# Altium PCB ups_lead_acid_electgpl_v1.0(1).PcbDoc (part 1 of 2)
Units mm, origin at the board's own origin, x right, y up, seen from the top; angles counter-clockwise.
Board outline 152.4 x 101.6 mm, 18 copper layers (F.Cu, F.Mask, B.Cu, B.Mask, F.SilkS, B.SilkS, F.Adhes, B.Adhes, F.Paste, B.Paste, Dwgs.User, Cmts.User, Eco1.User, Eco2.User, Edge.Cuts, Margin, B.CrtYd, F.CrtYd); 78 components, 42 nets, 240 pads, 288 vias.
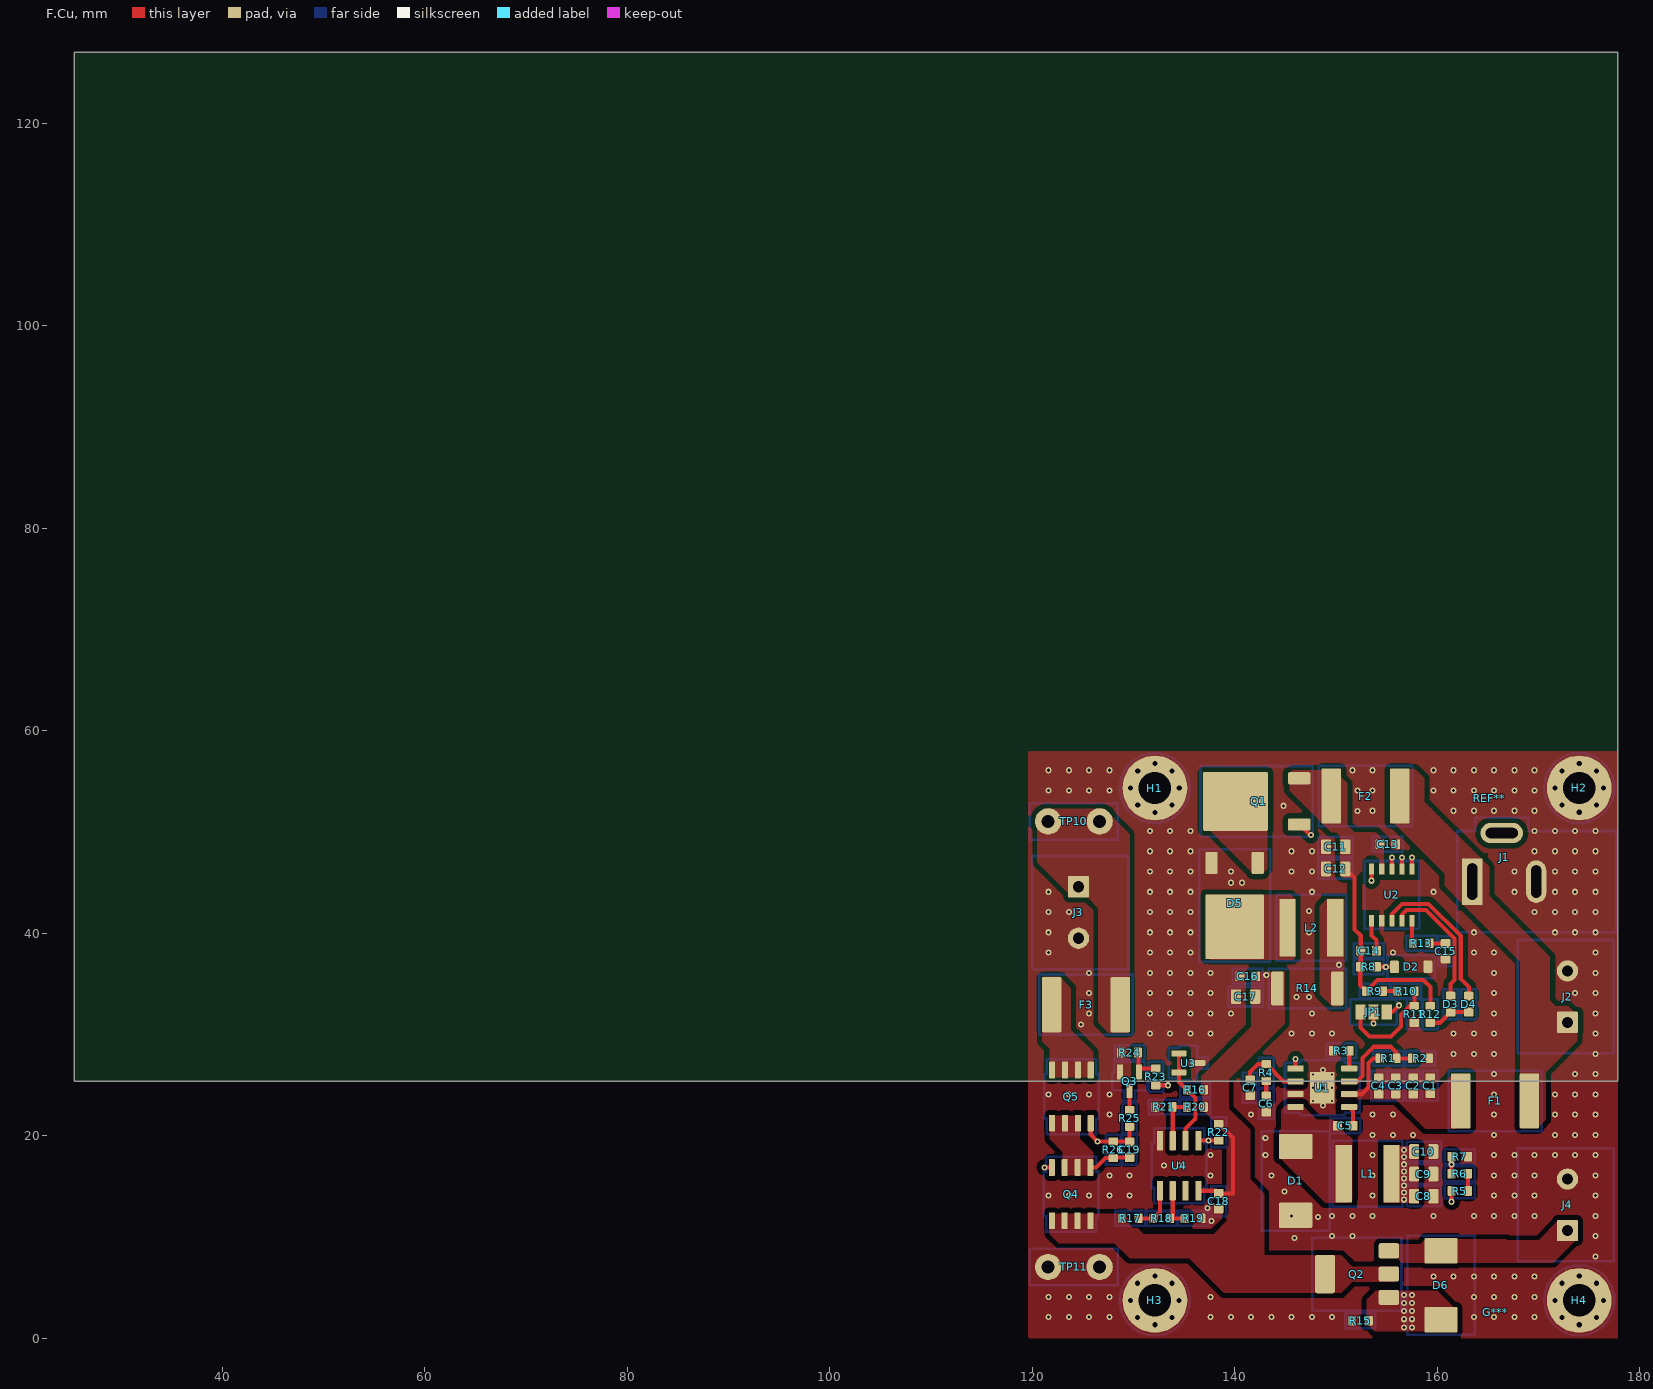
[diagram p0: F.Cu view]
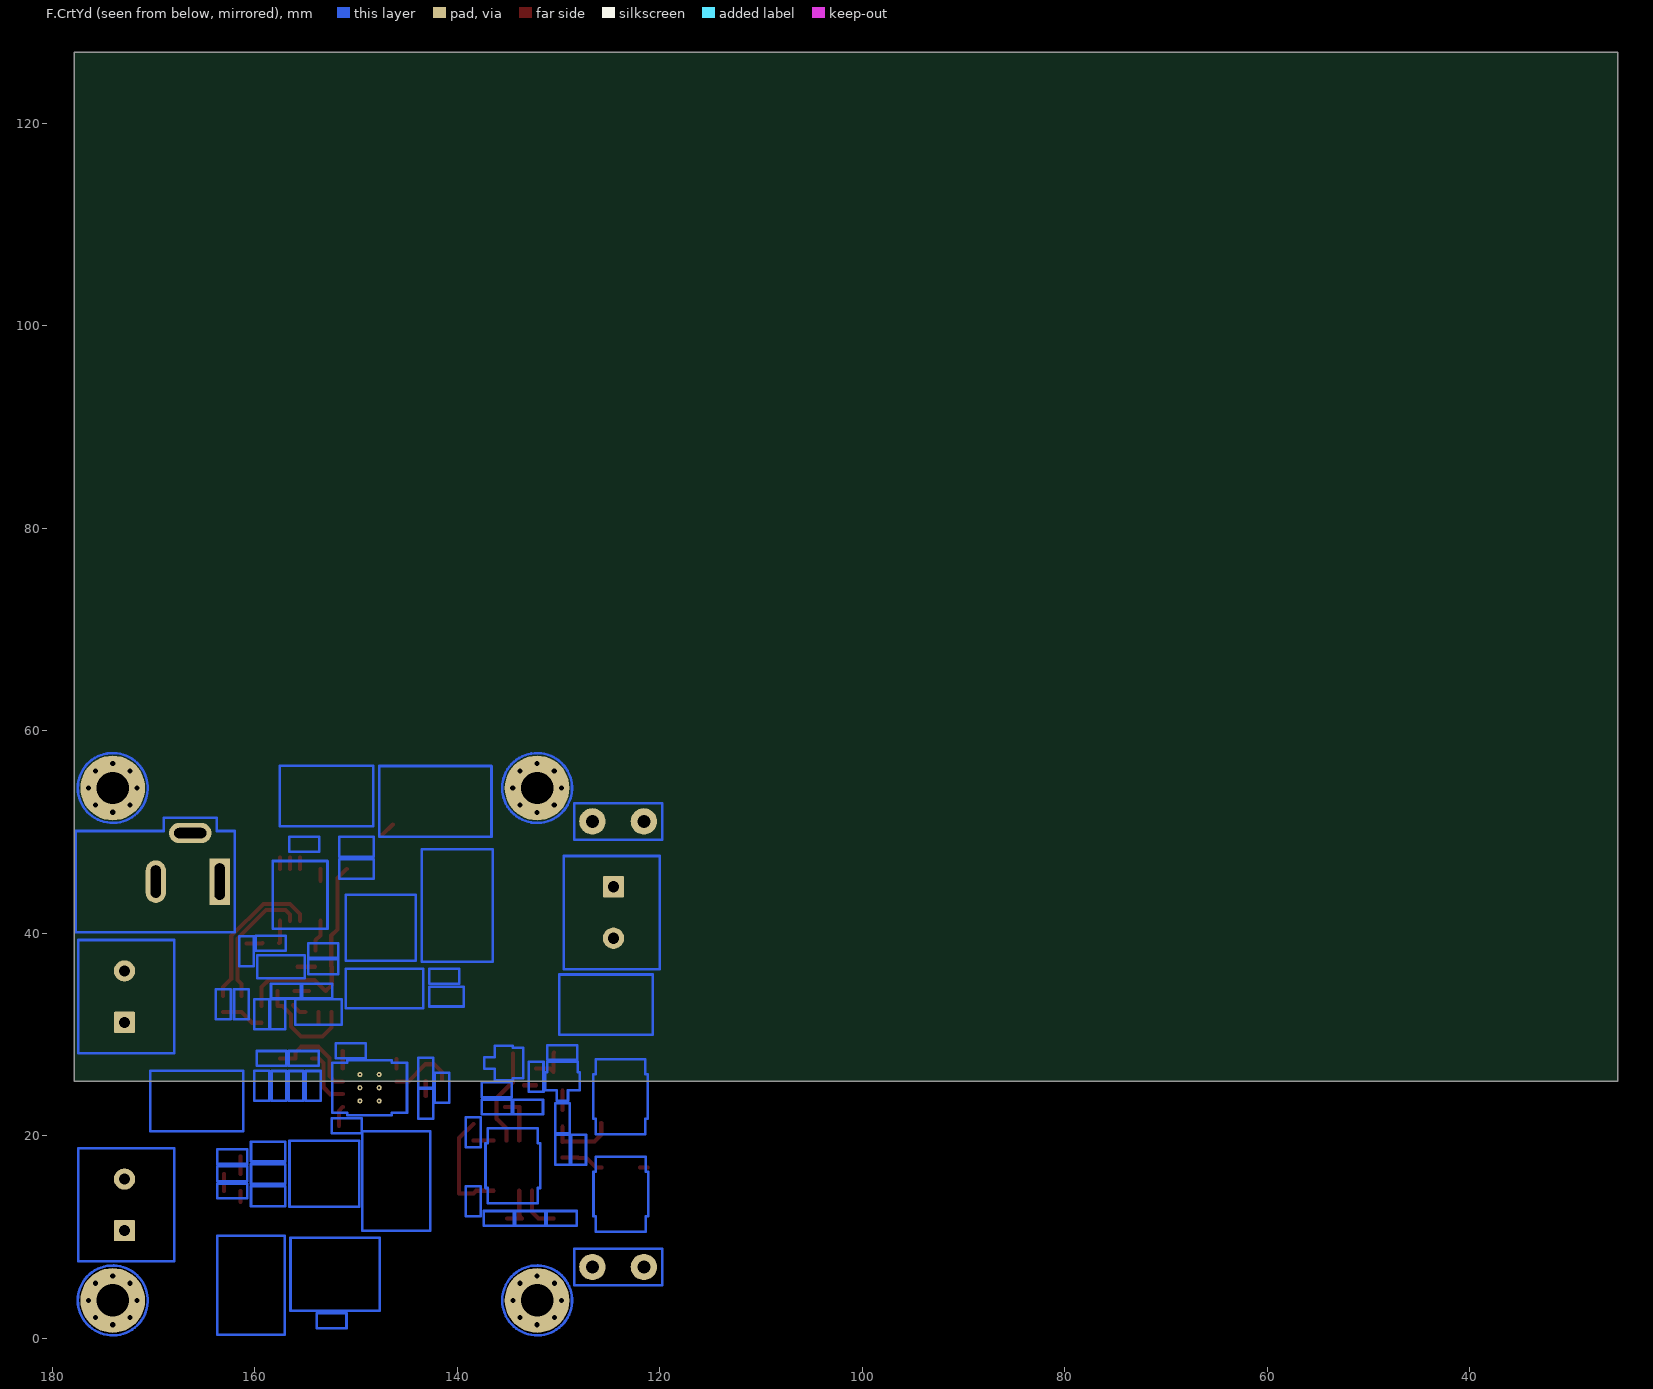
[diagram p1: F.CrtYd view, seen from below]
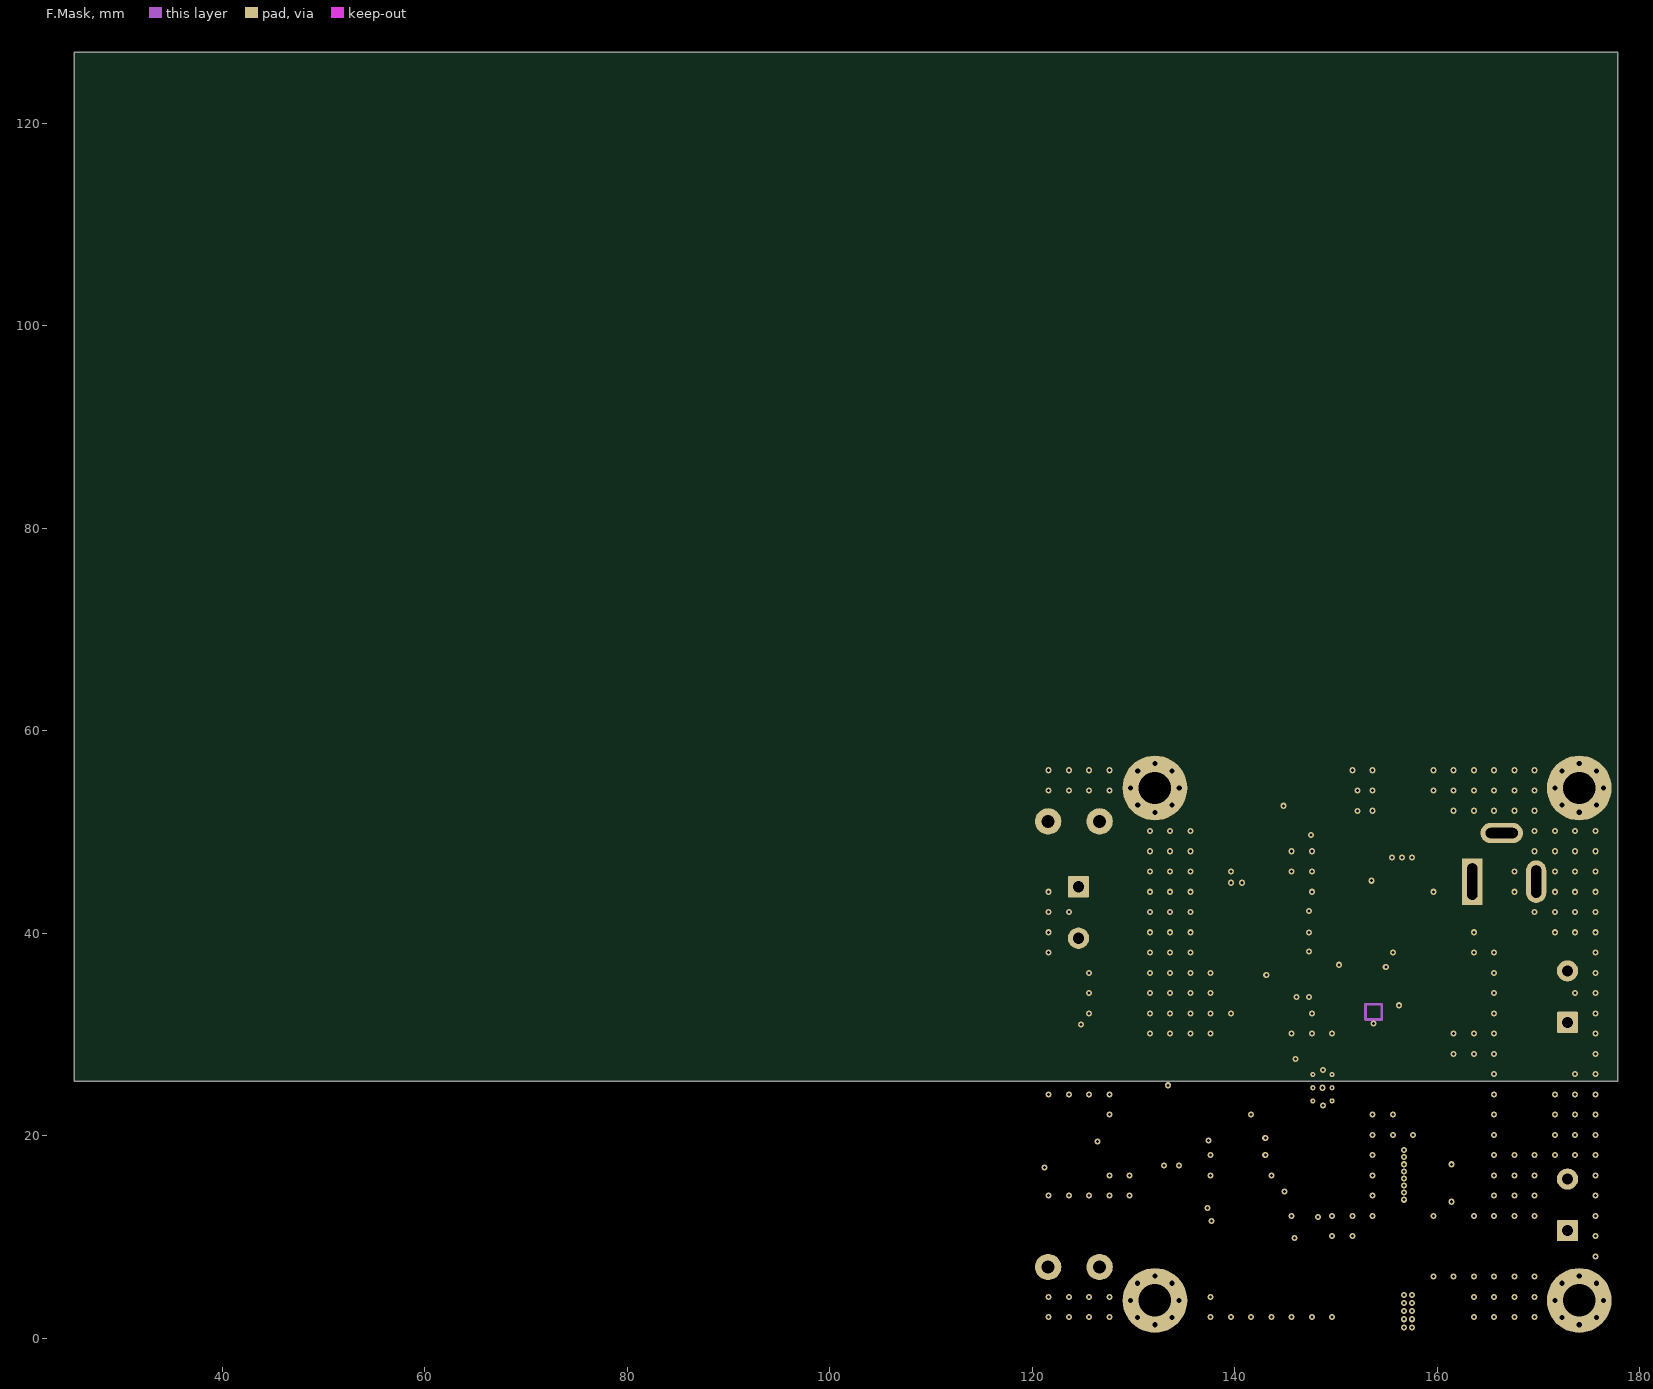
[diagram p2: F.Mask]
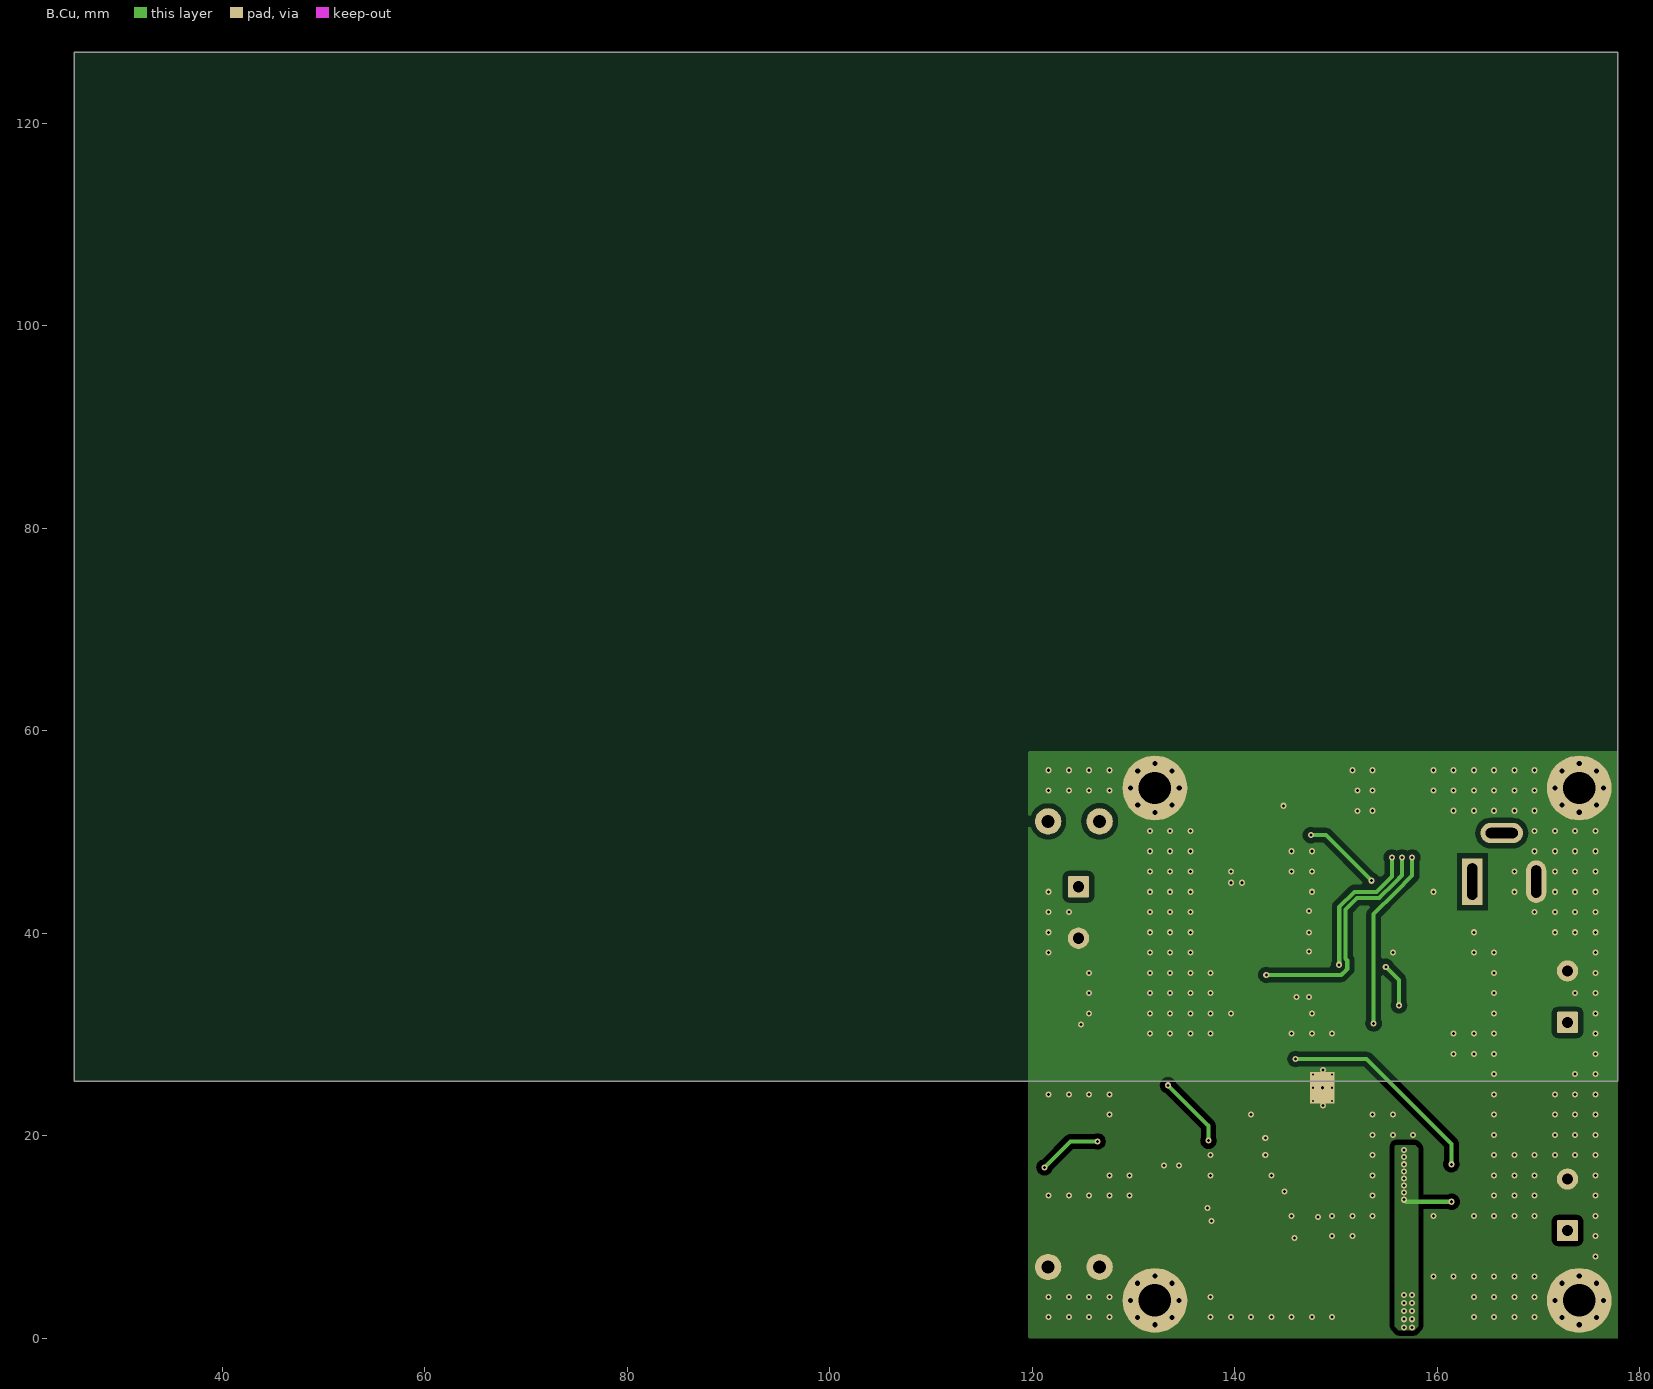
[diagram p3: B.Cu]
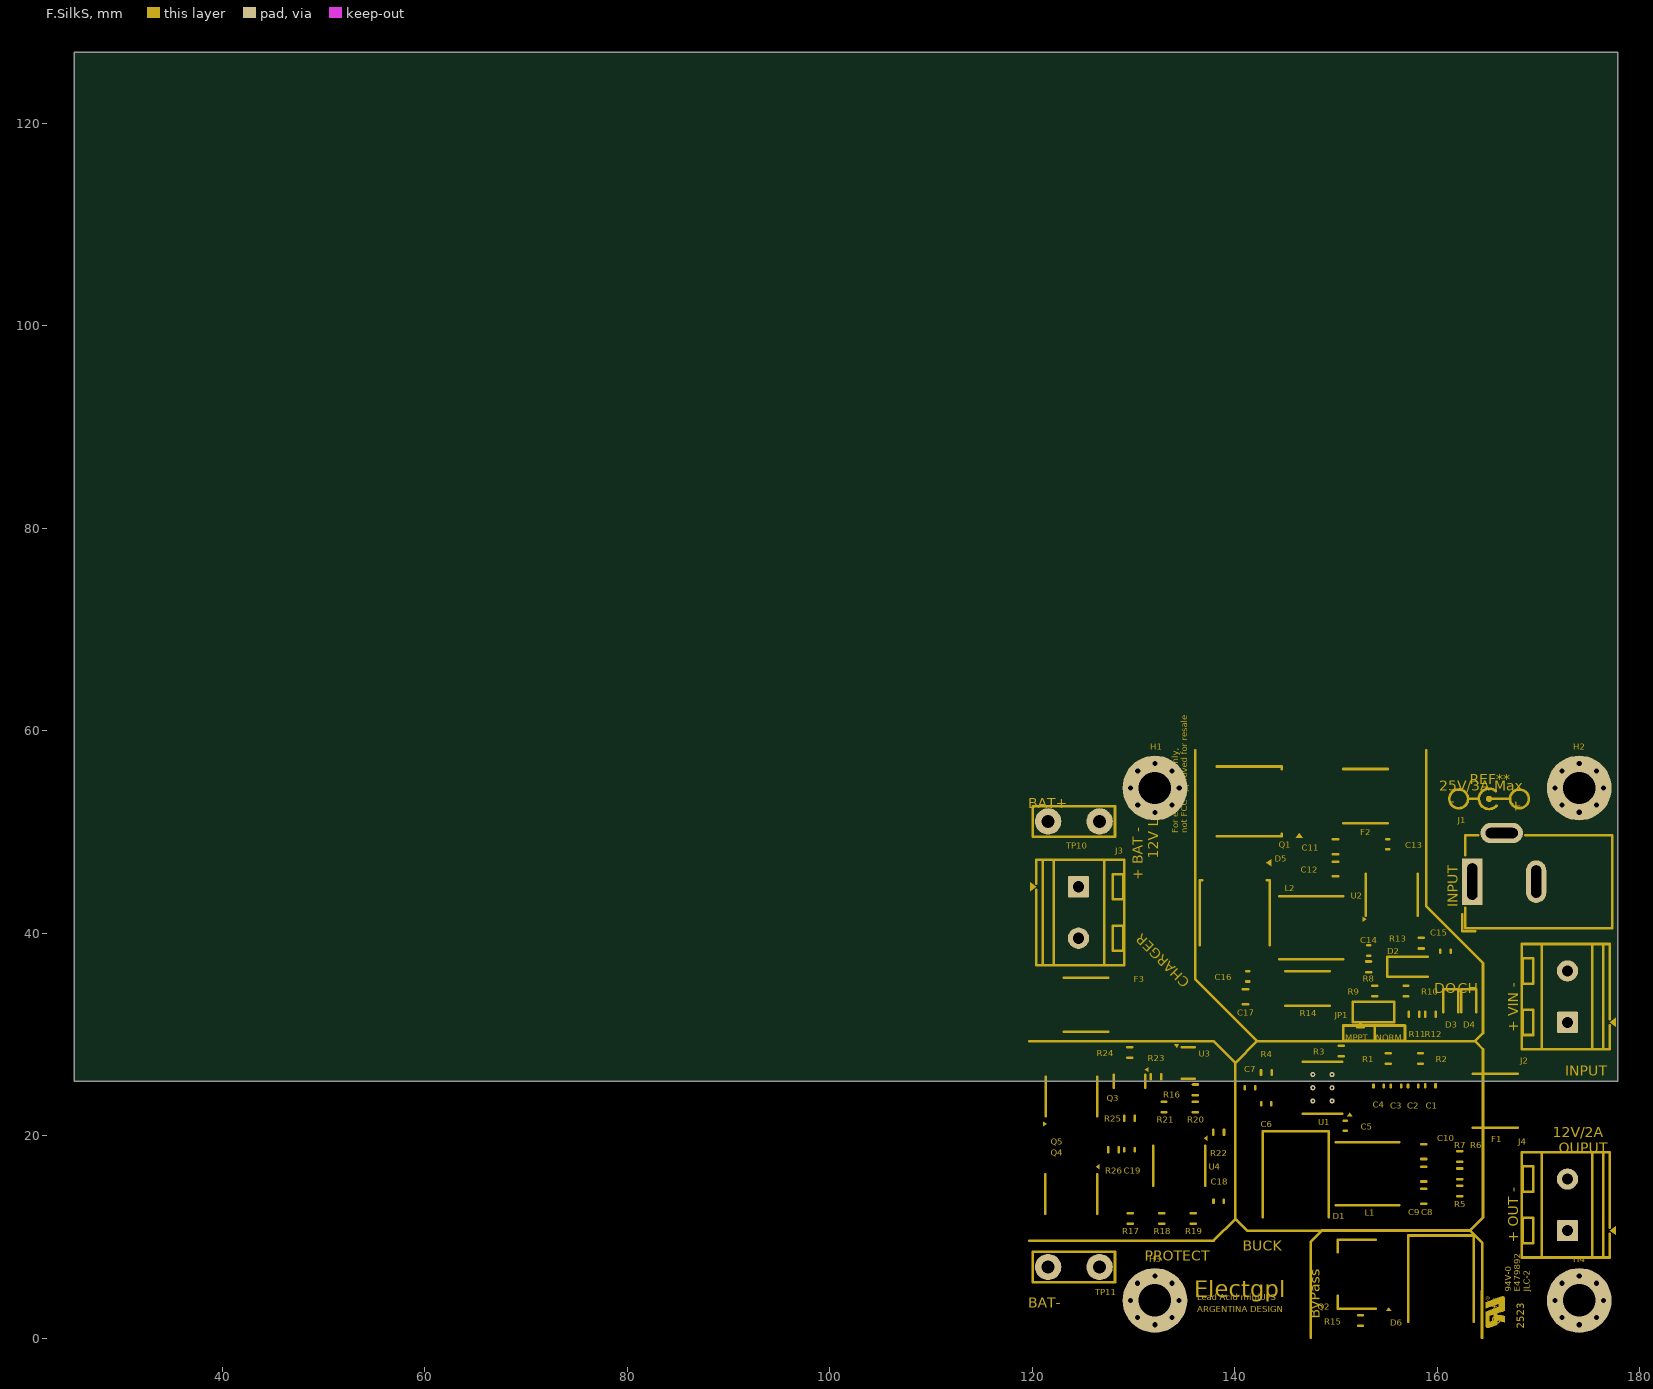
[diagram p4: F.SilkS]
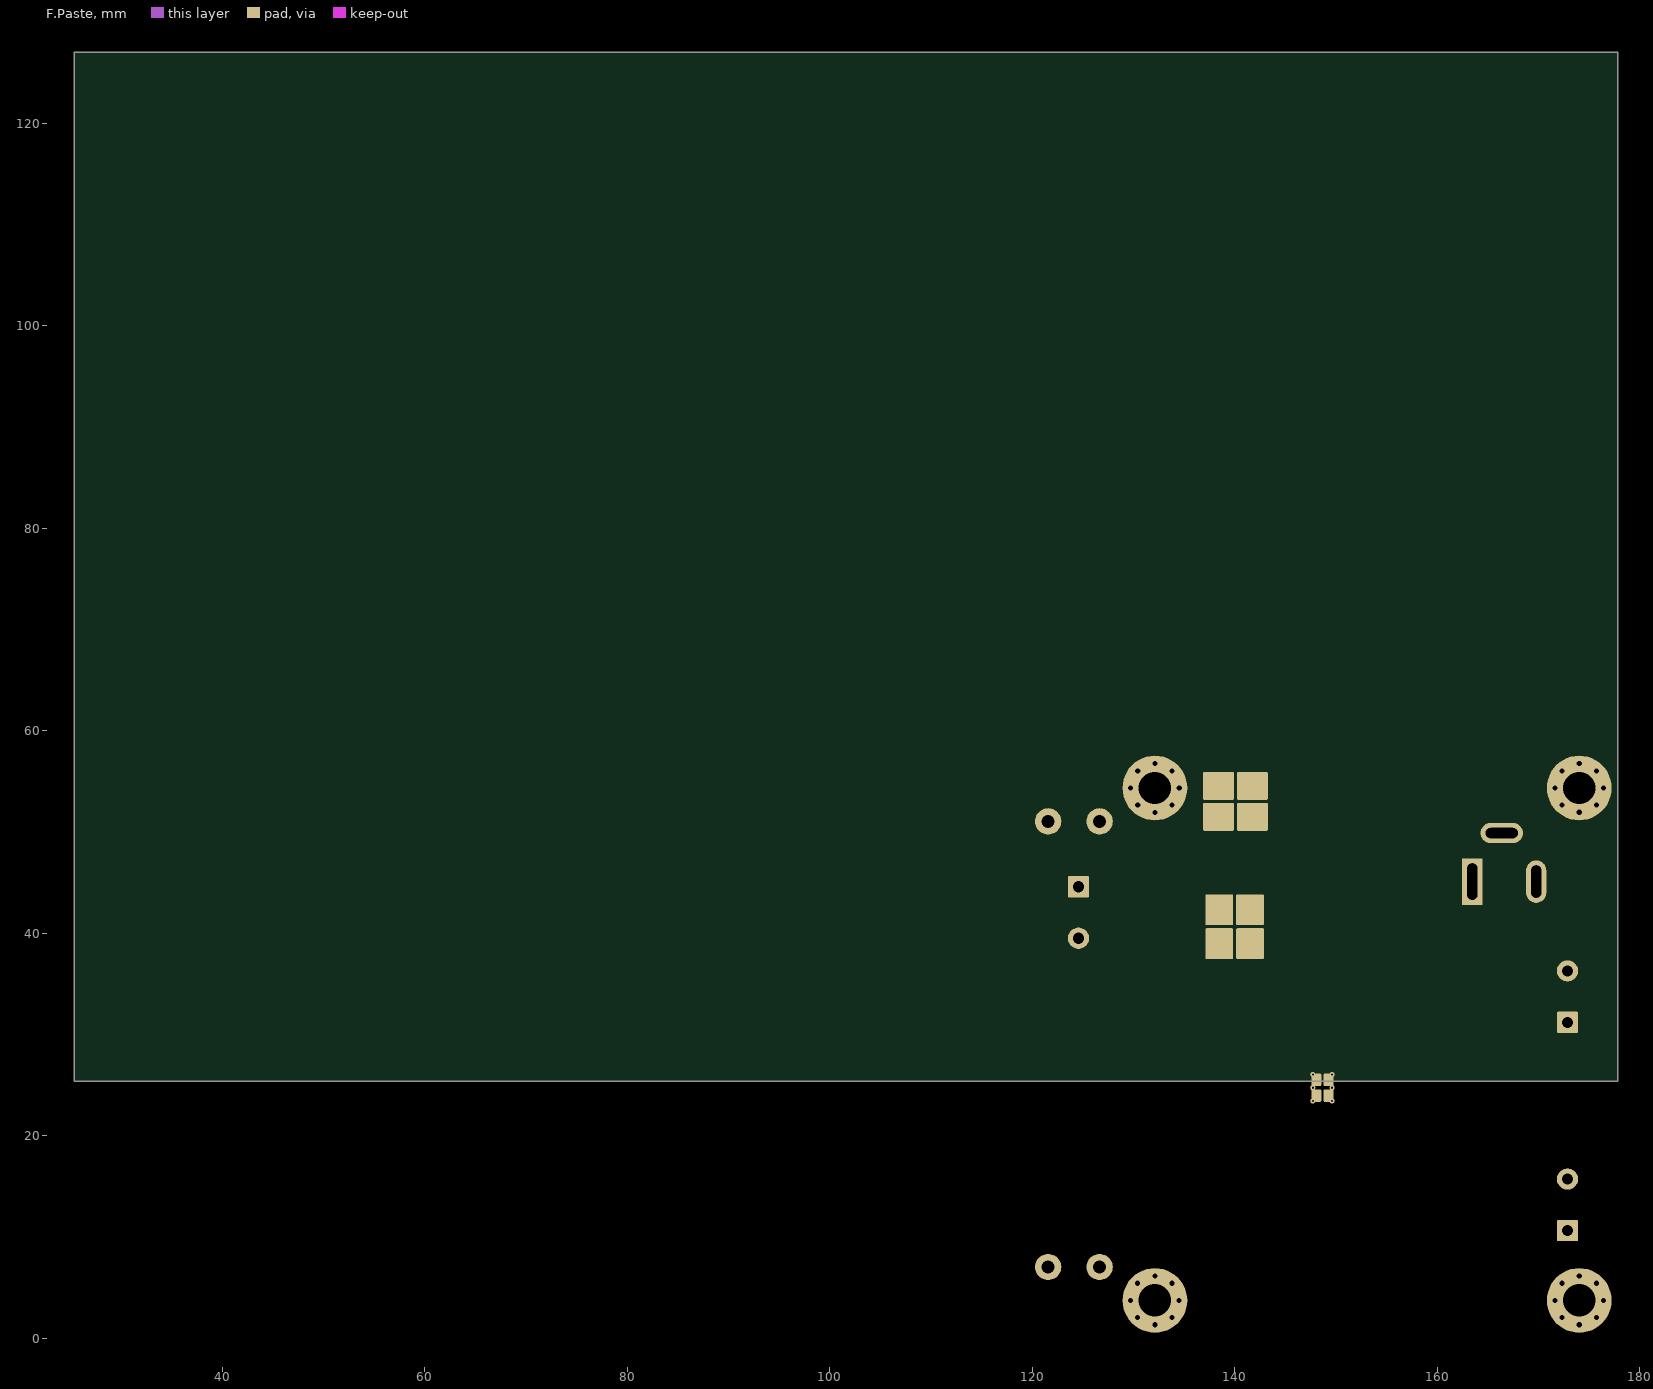
[diagram p5: F.Paste]
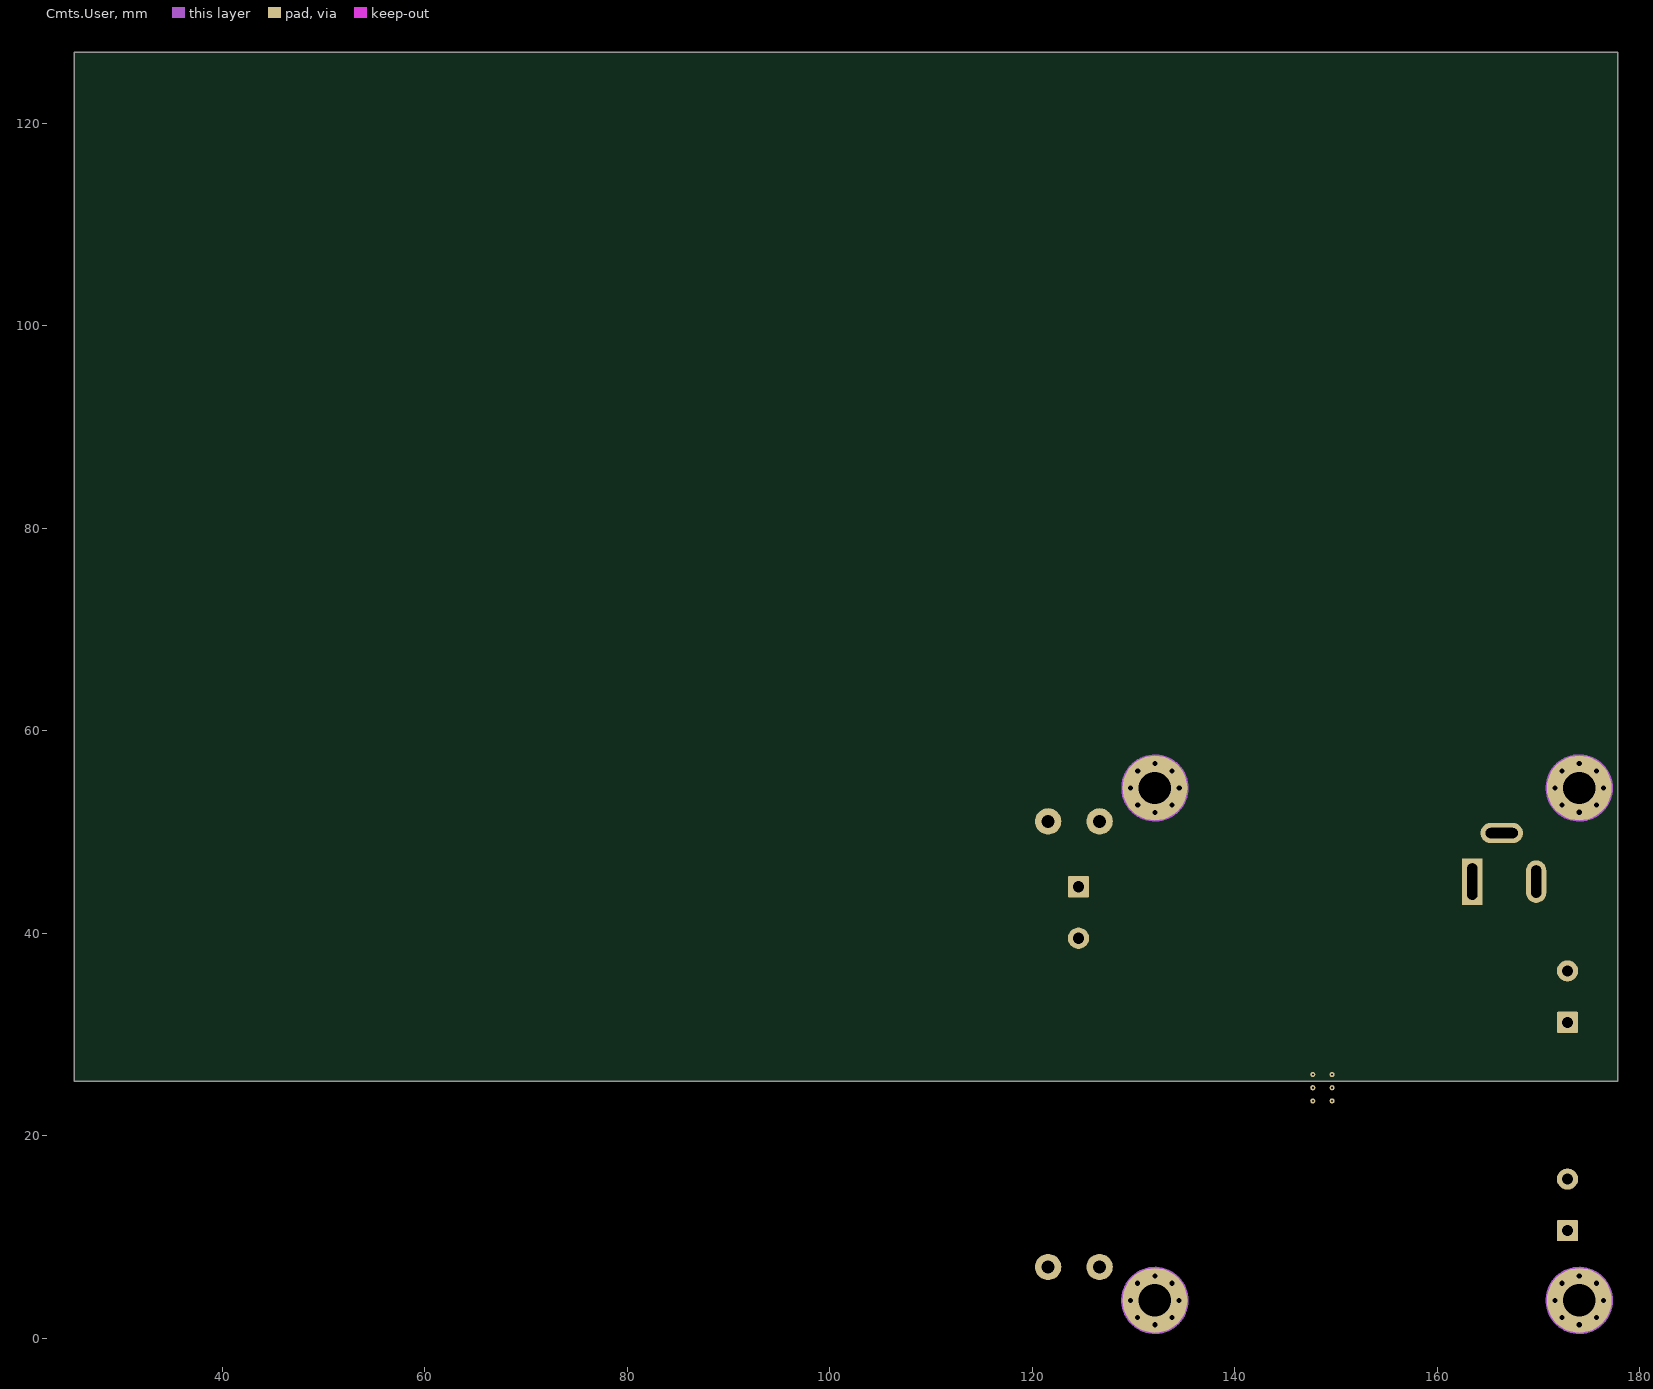
[diagram p6: Cmts.User]
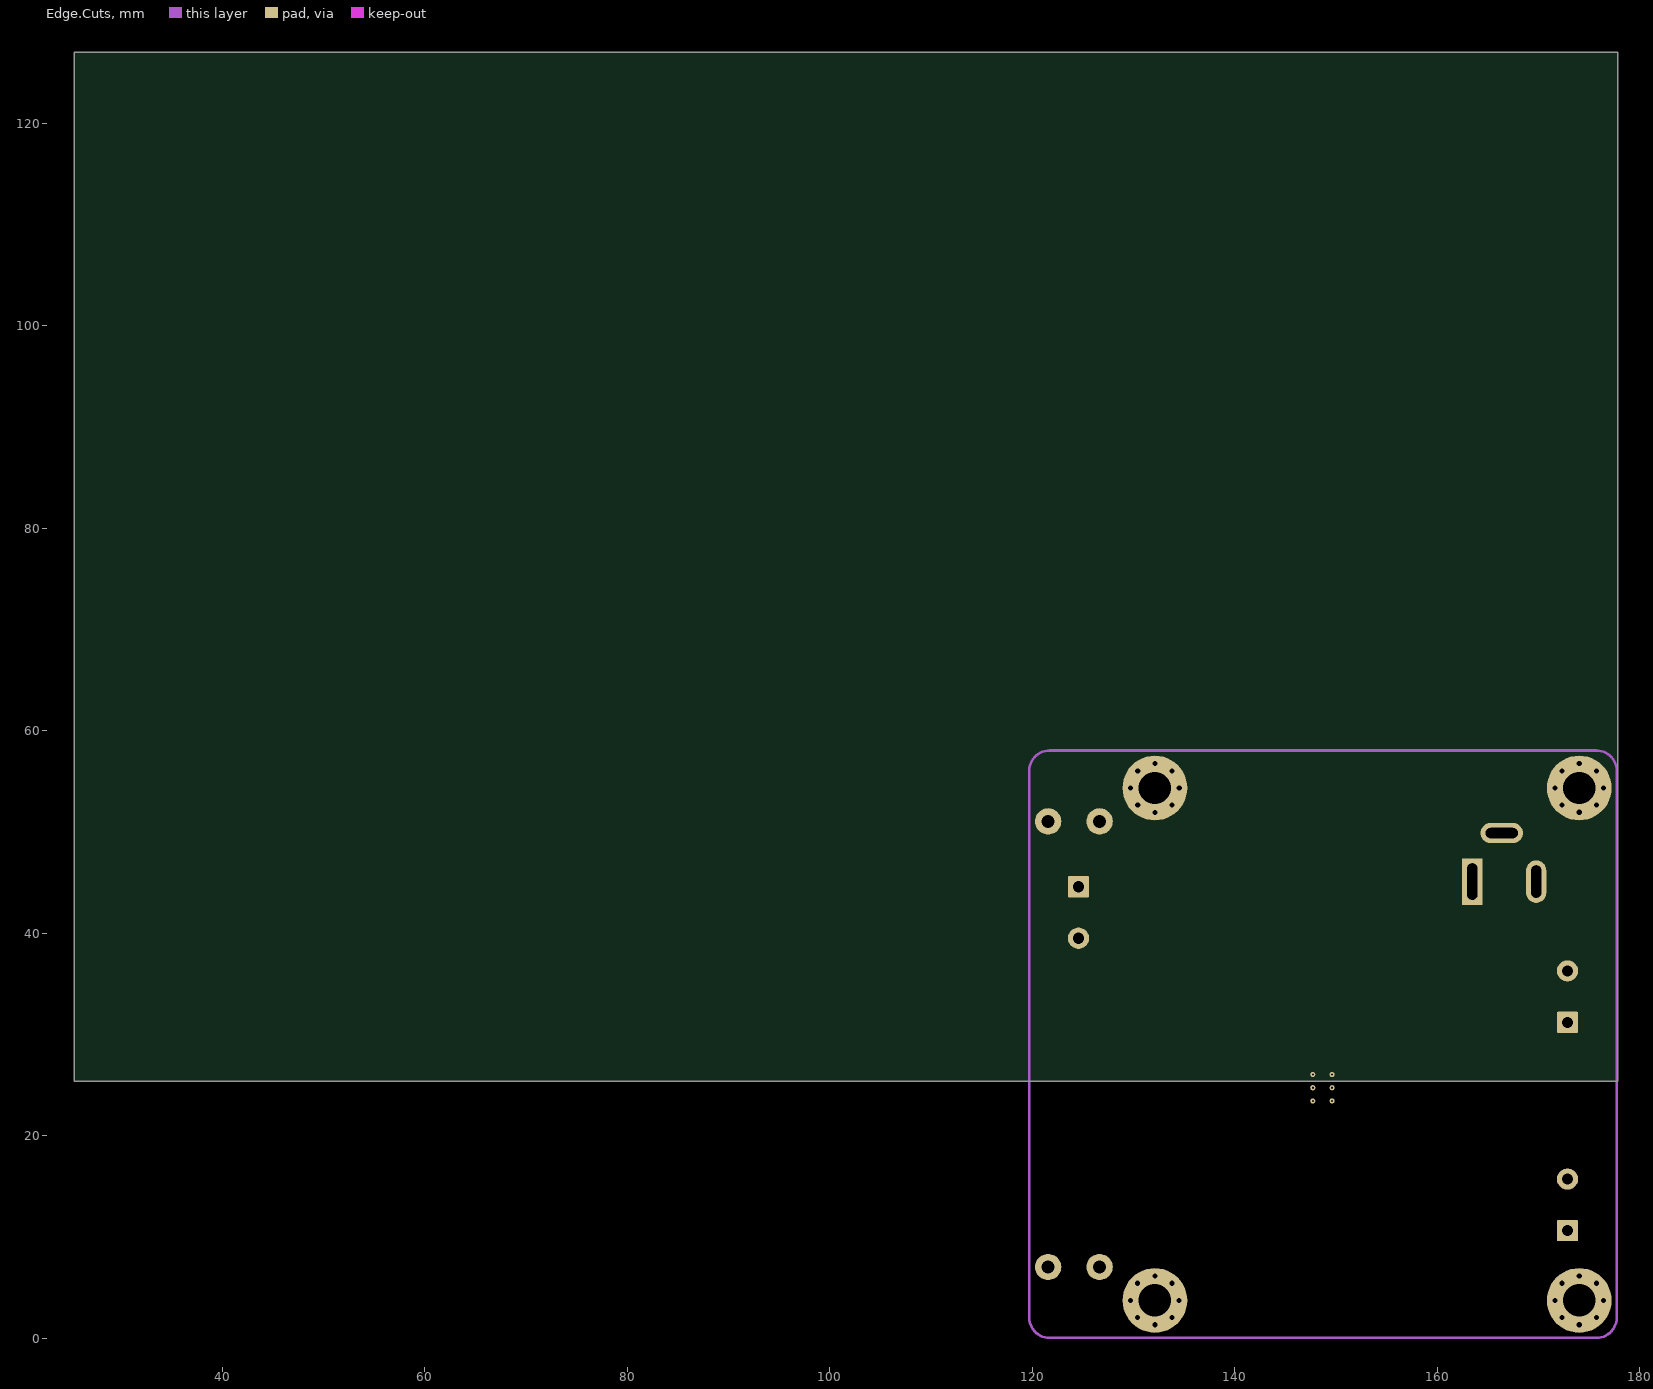
[diagram p7: Edge.Cuts]

## Layer stack, top to bottom
Top Solder: solder mask 0.0102, Solder Resist, Dk 3.5
F.Cu: signal copper 0.0356
Dielectric 1: dielectric 0.32, FR-4, Dk 4.8
F.Mask: signal copper 0.0356
Dielectric2: dielectric 0.32, FR-4, Dk 4.8
B.Cu: signal copper 0.0356
Dielectric3: dielectric 0.32, FR-4, Dk 4.8
B.Mask: signal copper 0.0356
Dielectric4: dielectric 0.32, FR-4, Dk 4.8
F.SilkS: signal copper 0.0356
Dielectric5: dielectric 0.32, FR-4, Dk 4.8
B.SilkS: signal copper 0.0356
Dielectric6: dielectric 0.32, FR-4, Dk 4.8
F.Adhes: signal copper 0.0356
Dielectric7: dielectric 0.32, FR-4, Dk 4.8
B.Adhes: signal copper 0.0356
Dielectric8: dielectric 0.32, FR-4, Dk 4.8
F.Paste: signal copper 0.0356
Dielectric9: dielectric 0.32, FR-4, Dk 4.8
B.Paste: signal copper 0.0356
Dielectric10: dielectric 0.32, FR-4, Dk 4.8
Dwgs.User: signal copper 0.0356
Dielectric11: dielectric 0.32, FR-4, Dk 4.8
Cmts.User: signal copper 0.0356
Dielectric12: dielectric 0.32, FR-4, Dk 4.8
Eco1.User: signal copper 0.0356
Dielectric13: dielectric 0.32, FR-4, Dk 4.8
Eco2.User: signal copper 0.0356
Dielectric14: dielectric 0.32, FR-4, Dk 4.8
Edge.Cuts: signal copper 0.0356
Dielectric15: dielectric 0.32, FR-4, Dk 4.8
Margin: signal copper 0.0356
Dielectric16: dielectric 0.32, FR-4, Dk 4.8
B.CrtYd: signal copper 0.0356
Dielectric17: dielectric 0.32, FR-4, Dk 4.8
F.CrtYd: signal copper 0.0356
Bottom Solder: solder mask 0.0102, Solder Resist, Dk 3.5

## Board outline
25.4,25.4 177.8,25.4 177.8,127 25.4,127

## Design rules (kind name [scope] priority, off if disabled: settings)
Clearance "Clearence 0,5_Polygon" [InNamedPolygon('F.Cu-/Battery Protect/BAT+') OR InNamedPolygon('F.Cu-/ByPass/OUTBP') OR InNamedPolygon('F.Cu-Net-(D1-K)') OR InNamedPolygon('F.Cu-Net-(C19-Pad2)') OR InNamedPolygon('F.Cu-Net-(U1-VIN)') OR InNamedPolygon('F.Cu-Net-(F3-Pad2)') OR InNamedPolygon('F.Cu-Net-(D5-K)') OR InNamedPolygon('F.Cu-Net-(Q1-S)') OR InNamedPolygon('F.Cu-/Battery Protect/P+') OR InNamedPolygon('F.Cu-/Buck/VIN') OR InNamedPolygon('F.Cu-Net-(Q1-D)') OR InNamedPolygon('F.Cu-Net-(Q1-S)-1') OR InNamedPolygon('F.Cu-/Buck/VIN-1') OR InNamedPolygon('F.Cu-+12V') OR InNamedPolygon('F.Cu-+12V-1') OR InNamedPolygon('F.Cu-/Battery Protect/P+-1') OR InNamedPolygon('F.Cu-Net-(U2-CSP)') OR InNamedPolygon('F.Cu-/Buck/VIN-2') OR InNamedPolygon('F.Cu-GND') OR InNamedPolygon('B.Cu-GND') OR InNamedPolygon('B.Cu-+12V')] p1: gap=0.5 ignorepadtopadclearanceinfootprint=FALSE
MinimumSolderMaskSliver [All] p1: minsoldermaskwidth=0
PolygonConnect Polygon_B.Cu-+12V_ConnectDirect [IsNamedPolygon('B.Cu-+12V')] p1: connectstyle=Direct reliefconductorwidth=0.254 reliefentries=4 polygonreliefangle="90 Angle" airgapwidth=0.254
PolygonConnect Polygon_B.Cu-GND_ConnectDirect [IsNamedPolygon('B.Cu-GND')] p2: connectstyle=Direct reliefconductorwidth=0.254 reliefentries=4 polygonreliefangle="90 Angle" airgapwidth=0.254
PolygonConnect Polygon_F.Cu-GND_ConnectDirect [IsNamedPolygon('F.Cu-GND')] p3: connectstyle=Direct reliefconductorwidth=0.254 reliefentries=4 polygonreliefangle="90 Angle" airgapwidth=0.254
PolygonConnect Polygon_F.Cu-/Buck/VIN-2_ConnectDirect [IsNamedPolygon('F.Cu-/Buck/VIN-2')] p4: connectstyle=Direct reliefconductorwidth=0.254 reliefentries=4 polygonreliefangle="90 Angle" airgapwidth=0.254
PolygonConnect Polygon_F.Cu-Net-(U2-CSP)_ConnectDirect [IsNamedPolygon('F.Cu-Net-(U2-CSP)')] p5: connectstyle=Direct reliefconductorwidth=0.254 reliefentries=4 polygonreliefangle="90 Angle" airgapwidth=0.254
PolygonConnect "Polygon_F.Cu-/Battery Protect/P+-1_ConnectDirect" [IsNamedPolygon('F.Cu-/Battery Protect/P+-1')] p6: connectstyle=Direct reliefconductorwidth=0.254 reliefentries=4 polygonreliefangle="90 Angle" airgapwidth=0.254
PolygonConnect Polygon_F.Cu-+12V-1_ConnectDirect [IsNamedPolygon('F.Cu-+12V-1')] p7: connectstyle=Direct reliefconductorwidth=0.254 reliefentries=4 polygonreliefangle="90 Angle" airgapwidth=0.254
PolygonConnect Polygon_F.Cu-+12V_ConnectDirect [IsNamedPolygon('F.Cu-+12V')] p8: connectstyle=Direct reliefconductorwidth=0.254 reliefentries=4 polygonreliefangle="90 Angle" airgapwidth=0.254
PolygonConnect Polygon_F.Cu-/Buck/VIN-1_ConnectDirect [IsNamedPolygon('F.Cu-/Buck/VIN-1')] p9: connectstyle=Direct reliefconductorwidth=0.254 reliefentries=4 polygonreliefangle="90 Angle" airgapwidth=0.254
PolygonConnect Polygon_F.Cu-Net-(Q1-S)-1_ConnectDirect [IsNamedPolygon('F.Cu-Net-(Q1-S)-1')] p10: connectstyle=Direct reliefconductorwidth=0.254 reliefentries=4 polygonreliefangle="90 Angle" airgapwidth=0.254
PolygonConnect Polygon_F.Cu-Net-(Q1-D)_ConnectDirect [IsNamedPolygon('F.Cu-Net-(Q1-D)')] p11: connectstyle=Direct reliefconductorwidth=0.254 reliefentries=4 polygonreliefangle="90 Angle" airgapwidth=0.254
PolygonConnect Polygon_F.Cu-/Buck/VIN_ConnectDirect [IsNamedPolygon('F.Cu-/Buck/VIN')] p12: connectstyle=Direct reliefconductorwidth=0.254 reliefentries=4 polygonreliefangle="90 Angle" airgapwidth=0.254
PolygonConnect "Polygon_F.Cu-/Battery Protect/P+_ConnectDirect" [IsNamedPolygon('F.Cu-/Battery Protect/P+')] p13: connectstyle=Direct reliefconductorwidth=0.254 reliefentries=4 polygonreliefangle="90 Angle" airgapwidth=0.254
PolygonConnect Polygon_F.Cu-Net-(Q1-S)_ConnectDirect [IsNamedPolygon('F.Cu-Net-(Q1-S)')] p14: connectstyle=Direct reliefconductorwidth=0.254 reliefentries=4 polygonreliefangle="90 Angle" airgapwidth=0.254
PolygonConnect Polygon_F.Cu-Net-(D5-K)_ConnectDirect [IsNamedPolygon('F.Cu-Net-(D5-K)')] p15: connectstyle=Direct reliefconductorwidth=0.254 reliefentries=4 polygonreliefangle="90 Angle" airgapwidth=0.254
PolygonConnect Polygon_F.Cu-Net-(F3-Pad2)_ConnectDirect [IsNamedPolygon('F.Cu-Net-(F3-Pad2)')] p16: connectstyle=Direct reliefconductorwidth=0.254 reliefentries=4 polygonreliefangle="90 Angle" airgapwidth=0.254
PolygonConnect Polygon_F.Cu-Net-(U1-VIN)_ConnectDirect [IsNamedPolygon('F.Cu-Net-(U1-VIN)')] p17: connectstyle=Direct reliefconductorwidth=0.254 reliefentries=4 polygonreliefangle="90 Angle" airgapwidth=0.254
PolygonConnect Polygon_F.Cu-Net-(C19-Pad2)_ConnectDirect [IsNamedPolygon('F.Cu-Net-(C19-Pad2)')] p18: connectstyle=Direct reliefconductorwidth=0.254 reliefentries=4 polygonreliefangle="90 Angle" airgapwidth=0.254
PolygonConnect Polygon_F.Cu-Net-(D1-K)_ConnectDirect [IsNamedPolygon('F.Cu-Net-(D1-K)')] p19: connectstyle=Direct reliefconductorwidth=0.254 reliefentries=4 polygonreliefangle="90 Angle" airgapwidth=0.254
PolygonConnect Polygon_F.Cu-/ByPass/OUTBP_ConnectDirect [IsNamedPolygon('F.Cu-/ByPass/OUTBP')] p20: connectstyle=Direct reliefconductorwidth=0.254 reliefentries=4 polygonreliefangle="90 Angle" airgapwidth=0.254
PolygonConnect "Polygon_F.Cu-/Battery Protect/BAT+_ConnectDirect" [IsNamedPolygon('F.Cu-/Battery Protect/BAT+')] p21: connectstyle=Direct reliefconductorwidth=0.254 reliefentries=4 polygonreliefangle="90 Angle" airgapwidth=0.254
RoutingVias [All] p1: holewidth=0.711 width=1.27 viastyle="Through Hole" minholewidth=0.711 minwidth=1.27 maxholewidth=0.711 maxwidth=1.27
SilkToSilkClearance [All] p1: silktosilkclearance=0
SilkToSolderMaskClearance [IsPad] p1: minsilkscreentomaskgap=0 clearancetoexposedcopper=TRUE
SolderMaskExpansion [All] p1: expansion=0.102 istentingtop=FALSE
Width [All] p1: maxlimit=10 minlimit=0.254 preferedwidth=0.254 midlayer3_maxwidth=0.254 midlayer7_maxwidth=0.254 midlayer9_maxwidth=0.254 midlayer11_maxwidth=0.254 midlayer13_maxwidth=0.254 midlayer15_maxwidth=0.254 midlayer17_maxwidth=0.254 midlayer21_maxwidth=0.254 midlayer23_maxwidth=0.254 midlayer27_maxwidth=0.254 midlayer29_maxwidth=0.254 minimp=50.000000 maximp=50.000000 favimp=50.000000
27 further rules are at their usual default settings.

## Components (designator, comment, footprint, x,y, rotation, side; value= is the part's Value field where it differs from the comment)
C1 "Comment" C_0603_1608Metric 159.3,24.958 r270 top value=2u2
C2 "Comment" C_0603_1608Metric 157.6,24.933 r270 top value=2u2
C3 "Comment" C_0603_1608Metric 155.9,24.933 r270 top value=2u2
C4 "Comment" C_0603_1608Metric 154.2,24.933 r270 top value=2u2
C5 "Comment" C_0603_1608Metric 150.9,21 r180 top value=100n
C6 "Comment" C_0603_1608Metric 143.1,23.158 r270 top value=4n7
C7 "Comment" C_0603_1608Metric 141.5,24.758 r270 top value=47p
C8 "Comment" C_0805_2012Metric 158.65,14.038 r180 top value=47u
C9 "Comment" C_0805_2012Metric 158.65,16.238 r180 top value=47u
C10 "Comment" C_0805_2012Metric 158.65,18.458 r180 top value=47u
C11 "Comment" C_0805_2012Metric 149.95,48.558 r180 top value=47u
C12 "Comment" C_0805_2012Metric 149.95,46.358 r180 top value=47u
C13 "Comment" C_0603_1608Metric 155.1,48.8 r0 top value=100n
C14 "Comment" C_0603_1608Metric 153.2,38.3 r0 top value=100n
C15 "Comment" C_0603_1608Metric 160.8,38.233 r270 top value=220n
C16 "Comment" C_0603_1608Metric 141.262,35.758 r180 top value=100n
C17 "Comment" C_0805_2012Metric 141.062,33.758 r180 top value=47u
C18 "Comment" C_0603_1608Metric 138.4,13.558 r270 top value=100n
C19 "Comment" C_0603_1608Metric 129.6,18.633 r270 top value=10n
D1 "Comment" D_SMC 146,15.557 r270 top value=SS54
D2 "Comment" D_SOD-123 157.4,36.7 r0 top value=5V1
D3 "Comment" LED_0603_1608Metric 161.3,33.013 r270 top value=LED
D4 "Comment" LED_0603_1608Metric 163.1,33.013 r270 top value=LED
D5 "Comment" TO-252-2 139.978,41.918 r270 top value=MBRD20100CT
D6 "Comment" D_SMC 160.35,5.258 r270 top value=SS54
F1 "Comment" Fuse_2920_7451Metric 165.7,23.458 r180 top value=500/24N
F2 "Comment" Fuse_2920_7451Metric 152.9,53.558 r180 top value=500/24N
F3 "Comment" Fuse_2920_7451Metric 125.3,32.958 r180 top value=500/24N
G*** "Comment" "Recognized Component very small" 165.7,2.6 r90 top value=LOGO
H1 "Comment" MountingHole_3.2mm_M3_Pad_Via 132.103,54.355 r0 top value=MountingHole_Pad
H2 "Comment" MountingHole_3.2mm_M3_Pad_Via 174,54.358 r0 top value=MountingHole_Pad
H3 "Comment" MountingHole_3.2mm_M3_Pad_Via 132.1,3.758 r0 top value=MountingHole_Pad
H4 "Comment" MountingHole_3.2mm_M3_Pad_Via 174,3.758 r0 top value=MountingHole_Pad
J1 "Comment" BarrelJack_GCT_DCJ200-10-A_Horizontal 163.45,45.108 r90 top value=Barrel_Jack_Switch
J2 "Comment" TerminalBlock_RND_205-00232_1x02_P5.08mm_Horizontal 172.842,31.213 r90 top value=Screw_Terminal_01x02
J3 "Comment" TerminalBlock_RND_205-00232_1x02_P5.08mm_Horizontal 124.558,44.603 r270 top value=Screw_Terminal_01x02
J4 "Comment" TerminalBlock_RND_205-00232_1x02_P5.08mm_Horizontal 172.842,10.658 r90 top value=Screw_Terminal_01x02
JP1 "Comment" SolderJumper-3_P1.3mm_Open_Pad1.0x1.5mm 153.7,32.243 r0 top value=MPPT
L1 "Comment" L_Taiyo-Yuden_NR-60xx 153.1,16.258 r0 top value=10u
L2 "Comment" L_Taiyo-Yuden_NR-60xx 147.55,40.558 r0 top value=10u
Q1 "Comment" TO-252-2 141.317,53.03 r180 top value=DMP4051LK3-13
Q2 "Comment" SOT-223-3_TabPin2 152.05,6.358 r180 top value=NTF6P02
Q3 "Comment" SOT-23 129.6,25.395 r270 top value=2N7002
Q4 "Comment" SOP-8_3.9x4.9mm_P1.27mm 123.83,14.258 r270 top value=AO4407
Q5 "Comment" SOP-8_3.9x4.9mm_P1.27mm 123.865,23.882 r90 top value=AO4407
R1 "Comment" R_0603_1608Metric 155.125,27.658 r0 top value=442k
R2 "Comment" R_0603_1608Metric 158.325,27.658 r0 top value=90k9
R3 "Comment" R_0603_1608Metric 150.5,28.4 r180 top value=243k
R4 "Comment" R_0603_1608Metric 143.1,26.258 r270 top value=16k9
R5 "Comment" R_0603_1608Metric 162.2,14.558 r0 top value=49R9
R6 "Comment" R_0603_1608Metric 162.2,16.258 r180 top value=33k
R7 "Comment" R_0603_1608Metric 162.2,17.958 r0 top value=2k2
R8 "Comment" R_0603_1608Metric 153.2,36.7 r0 top value=100k
R9 "Comment" R_0603_1608Metric 153.8,34.3 r0 top value=1M
R10 "Comment" R_0603_1608Metric 156.9,34.3 r0 top value=360k
R11 "Comment" R_0603_1608Metric 157.7,32 r270 top value=100k
R12 "Comment" R_0603_1608Metric 159.3,32 r270 top value=10k
R13 "Comment" R_0603_1608Metric 158.4,39.033 r0 top value=120R
R14 "Comment" R_2512_6332Metric 147.162,34.558 r180 top value=0R12
R15 "Comment" R_0603_1608Metric 152.4,1.758 r0 top value=100k
R16 "Comment" R_0603_1608Metric 136.1,24.558 r180 top value=10k
R17 "Comment" R_0603_1608Metric 129.675,11.858 r0 top value=47k
R18 "Comment" R_0603_1608Metric 132.775,11.858 r0 top value=47k
R19 "Comment" R_0603_1608Metric 135.875,11.858 r0 top value=47k
R20 "Comment" R_0603_1608Metric 136.1,22.858 r180 top value=15k
R21 "Comment" R_0603_1608Metric 133,22.858 r180 top value=4k7
R22 "Comment" R_0603_1608Metric 138.4,20.358 r270 top value=10k
R23 "Comment" R_0603_1608Metric 132.2,25.833 r90 top value=10k
R24 "Comment" R_0603_1608Metric 129.6,28.233 r180 top value=10k
R25 "Comment" R_0603_1608Metric 129.6,21.733 r90 top value=10R
R26 "Comment" R_0603_1608Metric 128,18.633 r270 top value=10k
REF** "Comment" Symbol_Barrel_Polarity 165.1,53.358 r0 top value=Symbol_Barrel_Polarity
TP10 "Comment" TestPoint_Bridge_Pitch5.08mm_Drill1.3mm 121.56,51.058 r0 top value=TestPoint_Alt
TP11 "Comment" TestPoint_Bridge_Pitch5.08mm_Drill1.3mm 121.56,7.058 r0 top value=TestPoint_Alt
U1 "Comment" HSOP-8-1EP_3.9x4.9mm_P1.27mm_EP2.41x3.1mm_ThermalVias 148.645,24.758 r180 top value=TPS54360DDA
U2 "Comment" SSOP-10_3.9x4.9mm_P1.00mm 155.5,43.8 r90 top value=CN3767
U3 "Comment" SOT-23 135.4,27.2 r0 top value=TL431AIDBZR
U4 "Comment" SOIC-8_3.9x4.9mm_P1.27mm 134.5,17.058 r270 top value=LM393

## Footprints (in the part's own frame and the unit in brackets; to place one, negate y for a bottom-side part, rotate by r counter-clockwise, add the part's x,y. Pads: shape width x height; smd on the part's side, far side on the other; paste and mask are expansions set on the pad)
BarrelJack_GCT_DCJ200-10-A_Horizontal [mm]
  rect 4.6x2 hole 1 slot 3.6 at 0 deg paste-2539.97 mask-4.6: 1(0,0)
  rrect100% 4.2x2 hole 1 slot 3.2 at 0 deg paste-2539.97 mask-4.2: 2(0,-6.3)
  rrect100% 2x4.2 hole 3.2 slot 1 at 0 deg paste-2539.97 mask-4.2: 3(4.8,-2.9)
  F.SilkS lines w0.254: -3.2,1 -4.9,1 -4.9,-0.3 ; -2.6,0.7 -4.6,0.7 -4.6,-13.8 4.6,-13.8 4.6,-5.2 ; 2.6,0.7 4.6,0.7 4.6,-0.6
  F.CrtYd lines w0.254: -5,1.5 -5,-14.2 5,-14.2 5,-5.5 6.3,-5.5 6.3,-0.3 5,-0.3 5,1.5 -5,1.5
C_0603_1608Metric [mm]
  rrect25% 0.9x0.95 smd paste-0.95 mask-0.95: 1(-0.775,0) 2(0.775,0)
  F.SilkS lines w0.254: 0.141,-0.51 -0.141,-0.51 ; 0.141,0.51 -0.141,0.51
  F.CrtYd lines w0.254: 1.48,-0.73 1.48,0.73 -1.48,0.73 -1.48,-0.73 1.48,-0.73
C_0805_2012Metric [mm]
  rrect25% 1x1.45 smd paste-1.45 mask-1.45: 1(-0.95,0) 2(0.95,0)
  F.SilkS lines w0.254: 0.261,0.735 -0.261,0.735 ; 0.261,-0.735 -0.261,-0.735
  F.CrtYd lines w0.254: 1.7,0.98 -1.7,0.98 -1.7,-0.98 1.7,-0.98 1.7,0.98
D_SMC [mm]
  rrect10% 2.5x3.3 smd paste-3.3 mask-3.3: 1(-3.4,0) 2(3.4,0)
  F.SilkS lines w0.254: 3.6,-3.25 -4.91,-3.25 -4.91,3.25 3.6,3.25
  F.CrtYd lines w0.254: 4.9,-3.35 4.9,3.35 -4.9,3.35 -4.9,-3.35 4.9,-3.35
D_SOD-123 [mm]
  rrect25% 0.9x1.2 smd paste-1.2 mask-1.2: 1(-1.65,0) 2(1.65,0)
  F.SilkS lines w0.254: 1.65,-1 -2.36,-1 -2.36,1 1.65,1
  F.CrtYd lines w0.254: -2.35,-1.15 2.35,-1.15 2.35,1.15 -2.35,1.15 -2.35,-1.15
Fuse_2920_7451Metric [mm]
  rrect13% 1.925x5.45 smd paste-5.45 mask-5.45: 1(-3.387,0) 2(3.387,0)
  F.SilkS lines w0.254: 2.204,2.67 -2.204,2.67 ; 2.204,-2.67 -2.204,-2.67
  F.CrtYd lines w0.254: 4.6,2.98 -4.6,2.98 -4.6,-2.98 4.6,-2.98 4.6,2.98
HSOP-8-1EP_3.9x4.9mm_P1.27mm_EP2.41x3.1mm_ThermalVias [mm]
  rrect25% 1.6x0.6 smd paste-1.6 mask-1.6: 1(-2.65,1.905) 2(-2.65,0.635) 3(-2.65,-0.635) 4(-2.65,-1.905) 5(2.65,-1.905) 6(2.65,-0.635) 7(2.65,0.635) 8(2.65,1.905)
  round 0.5 hole 0.2 paste-2539.97 mask-0.5: 9(-0.955,1.3) 9(-0.955,0) 9(-0.955,-1.3) 9(0.955,1.3) 9(0.955,0) 9(0.955,-1.3)
  rect 2.41x3.1 smd paste-3.1 mask-3.1: 9(0,0)
  rect 2.41x3.1 on Mid2 paste-3.1 mask-3.1: 9(0,0)
  rrect25% 0.97x1.25 on Mid13 paste-1.25 mask-1.25: Un1(-0.6,0.775) Un2(-0.6,-0.775) Un3(0.6,0.775) Un4(0.6,-0.775)
  F.SilkS region: -2.7,2.465 -2.94,2.795 -2.46,2.795
  F.SilkS lines w0.254: 1.95,2.56 0,2.56 -1.95,2.56 ; 1.95,-2.56 0,-2.56 -1.95,-2.56
  F.CrtYd lines w0.254: 3.7,2.46 3.7,-2.46 2.2,-2.46 2.2,-2.7 -2.2,-2.7 -2.2,-2.46 -3.7,-2.46 -3.7,2.46 -2.2,2.46 -2.2,2.7 2.2,2.7 2.2,2.46 3.7,2.46
L_Taiyo-Yuden_NR-60xx [mm]
  rect 1.6x5.7 smd paste-5.7 mask-5.7: 1(-2.35,0) 2(2.35,0)
  F.SilkS lines w0.254: -3.15,-3.1 3.15,-3.1 ; -3.15,3.1 3.15,3.1
  F.CrtYd lines w0.254: -3.45,-3.25 3.45,-3.25 3.45,3.25 -3.45,3.25 -3.45,-3.25
LED_0603_1608Metric [mm]
  rrect25% 0.875x0.95 smd paste-0.95 mask-0.95: 1(-0.787,0) 2(0.787,0)
  F.SilkS lines w0.254: 0.8,-0.735 -1.485,-0.735 -1.485,0.735 0.8,0.735
  F.CrtYd lines w0.254: 1.48,-0.73 1.48,0.73 -1.48,0.73 -1.48,-0.73 1.48,-0.73
MountingHole_3.2mm_M3_Pad_Via [mm]
  round 0.8 hole 0.5 paste-2539.97 mask-0.8: 1(-2.4,0) 1(-1.697,-1.697) 1(-1.697,1.697) 1(0,-2.4) 1(0,2.4) 1(1.697,-1.697) 1(1.697,1.697) 1(2.4,0)
  round 6.4 hole 3.2 paste-2539.97 mask-6.4: 1(0,0)
  Cmts.User circle w0.254: c0,0 r3.2
  F.CrtYd circle w0.254: c0,0 r3.45
R_0603_1608Metric [mm]
  rrect25% 0.8x0.95 smd paste-0.95 mask-0.95: 1(-0.825,0) 2(0.825,0)
  F.SilkS lines w0.254: -0.237,-0.523 0.237,-0.523 ; -0.237,0.523 0.237,0.523
  F.CrtYd lines w0.254: -1.48,-0.73 1.48,-0.73 1.48,0.73 -1.48,0.73 -1.48,-0.73
R_2512_6332Metric [mm]
  rrect20% 1.225x3.35 smd paste-3.35 mask-3.35: 1(-2.963,0) 2(2.963,0)
  F.SilkS lines w0.254: 2.177,1.71 -2.177,1.71 ; 2.177,-1.71 -2.177,-1.71
  F.CrtYd lines w0.254: 3.83,1.93 -3.83,1.93 -3.83,-1.93 3.83,-1.93 3.83,1.93
"Recognized Component very small" [mm]
  F.SilkS region: 260 vertices and 1 holes, not listed, extent -1.561,-0.944 1.56,0.941
  F.SilkS region: 1.406,0.935 1.436,0.927 1.462,0.914 1.486,0.898 1.505,0.877 1.522,0.854 1.534,0.828 1.542,0.801 1.546,0.773 1.545,0.744 1.539,0.715 1.528,0.687 1.512,0.661 1.499,0.645 1.474,0.623 1.447,0.606 1.416,0.595 1.383,0.59 1.382,0.59 1.367,0.589 1.353,0.59 1.342,0.591 1.342,0.591 1.312,0.599 1.284,0.613 1.258,0.631 1.242,0.646 1.223,0.671 1.209,0.697 1.2,0.724 1.197,0.754 1.196,0.763 1.197,0.765 1.199,0.795 1.205,0.823 1.217,0.849 1.234,0.873 1.246,0.886 1.27,0.907 1.295,0.922 1.322,0.932 1.352,0.937 1.374,0.938 hole: 1.362,0.912 1.336,0.908 1.31,0.9 1.286,0.885 1.267,0.87 1.248,0.846 1.234,0.82 1.226,0.793 1.223,0.765 1.226,0.737 1.234,0.71 1.247,0.684 1.266,0.66 1.267,0.66 1.29,0.641 1.316,0.627 1.344,0.619 1.373,0.616 1.402,0.62 1.407,0.621 1.435,0.631 1.46,0.647 1.481,0.666 1.498,0.689 1.511,0.715 1.518,0.743 1.519,0.772 1.517,0.787 1.51,0.816 1.498,0.841 1.482,0.863 1.462,0.881 1.439,0.895 1.415,0.906 1.389,0.911
  F.SilkS region: 1.359,0.867 1.382,0.866 1.399,0.863 1.411,0.858 1.42,0.851 1.425,0.841 1.427,0.827 1.427,0.825 1.427,0.807 1.422,0.794 1.414,0.785 1.411,0.783 1.404,0.779 1.404,0.776 1.409,0.773 1.416,0.769 1.421,0.76 1.425,0.746 1.428,0.727 1.428,0.727 1.43,0.713 1.432,0.702 1.434,0.695 1.434,0.694 1.436,0.689 1.432,0.686 1.424,0.686 1.419,0.687 1.414,0.69 1.411,0.697 1.409,0.708 1.407,0.725 1.405,0.742 1.402,0.753 1.396,0.76 1.388,0.763 1.375,0.765 1.368,0.765 1.343,0.765 1.342,0.726 1.341,0.687 1.333,0.686 1.325,0.687 1.322,0.689 1.322,0.694 1.322,0.703 1.321,0.717 1.321,0.735 1.321,0.756 1.321,0.779 1.321,0.78 1.322,0.817 1.322,0.867 hole: 1.343,0.851 1.343,0.817 1.343,0.784 1.358,0.784 1.37,0.784 1.381,0.786 1.384,0.787 1.397,0.792 1.404,0.801 1.407,0.814 1.407,0.817 1.406,0.83 1.401,0.838 1.392,0.844 1.378,0.848 1.367,0.849
SOIC-8_3.9x4.9mm_P1.27mm [mm]
  rrect25% 1.95x0.6 smd paste-1.95 mask-1.95: 1(-2.475,1.905) 2(-2.475,0.635) 3(-2.475,-0.635) 4(-2.475,-1.905) 5(2.475,-1.905) 6(2.475,-0.635) 7(2.475,0.635) 8(2.475,1.905)
  F.SilkS region: -2.7,2.465 -2.94,2.795 -2.46,2.795
  F.SilkS lines w0.254: 1.95,-2.56 0,-2.56 -1.95,-2.56 ; 1.95,2.56 0,2.56 -1.95,2.56
  F.CrtYd lines w0.254: 2.2,-2.7 -2.2,-2.7 -2.2,-2.46 -3.7,-2.46 -3.7,2.46 -2.2,2.46 -2.2,2.7 2.2,2.7 2.2,2.46 3.7,2.46 3.7,-2.46 2.2,-2.46 2.2,-2.7
SolderJumper-3_P1.3mm_Open_Pad1.0x1.5mm [mm]
  rect 1x1.5 smd paste-1.5 mask-1.5: 1(-1.3,0) 2(0,0) 3(1.3,0)
  F.Mask lines w0.254: -0.8,-0.75 0.8,-0.75 0.8,0.75 -0.8,0.75 -0.8,-0.75
  F.SilkS lines w0.254: -2.05,-1 2.05,-1 2.05,1 -2.05,1 -2.05,-1 ; -1.6,-1.5 -1,-1.5 -1.3,-1.2 -1.6,-1.5
  F.CrtYd lines w0.254: -2.3,-1.25 2.3,-1.25 2.3,1.25 -2.3,1.25 -2.3,-1.25
SOP-8_3.9x4.9mm_P1.27mm [mm]
  rrect25% 1.65x0.6 smd paste-1.65 mask-1.65: 1(-2.625,1.905) 2(-2.625,0.635) 3(-2.625,-0.635) 4(-2.625,-1.905) 5(2.625,-1.905) 6(2.625,-0.635) 7(2.625,0.635) 8(2.625,1.905)
  F.SilkS region: -2.7,2.465 -2.94,2.795 -2.46,2.795
  F.SilkS lines w0.254: 1.95,-2.56 0,-2.56 -1.95,-2.56 ; 1.95,2.56 0,2.56 -1.95,2.56
  F.CrtYd lines w0.254: 2.2,-2.7 -2.2,-2.7 -2.2,-2.46 -3.7,-2.46 -3.7,2.46 -2.2,2.46 -2.2,2.7 2.2,2.7 2.2,2.46 3.7,2.46 3.7,-2.46 2.2,-2.46 2.2,-2.7
SOT-23 [mm]
  rrect25% 1.475x0.6 smd paste-1.475 mask-1.475: 1(-0.937,0.95) 2(-0.937,-0.95) 3(0.937,0)
  F.SilkS region: -1.162,1.51 -1.402,1.84 -0.923,1.84
  F.SilkS lines w0.254: 0.65,-1.56 0,-1.56 -0.65,-1.56 ; 0.65,1.56 0,1.56 -0.65,1.56
  F.CrtYd lines w0.254: 0.9,-1.7 -0.9,-1.7 -0.9,-1.5 -1.93,-1.5 -1.93,1.5 -0.9,1.5 -0.9,1.7 0.9,1.7 0.9,0.55 1.93,0.55 1.93,-0.55 0.9,-0.55 0.9,-1.7
SOT-223-3_TabPin2 [mm]
  rrect25% 2x1.5 smd paste-2 mask-2: 1(-3.15,2.3) 2(-3.15,0) 3(-3.15,-2.3)
  rrect25% 2x3.8 smd paste-3.8 mask-3.8: 2(3.15,0)
  F.SilkS region: -3.13,3.31 -3.37,3.64 -2.89,3.64
  F.SilkS lines w0.254: 1.91,2.15 1.91,3.41 -1.85,3.41 ; 1.91,-2.15 1.91,-3.41 -1.85,-3.41
  F.CrtYd lines w0.254: 4.4,3.6 -4.4,3.6 -4.4,-3.6 4.4,-3.6 4.4,3.6
SSOP-10_3.9x4.9mm_P1.00mm [mm]
  rect 1.1x0.51 smd paste-1.1 mask-1.1: 1(-2.55,2) 2(-2.55,1) 3(-2.55,0) 4(-2.55,-1) 5(-2.55,-2) 6(2.55,-2) 7(2.55,-1) 8(2.55,0) 9(2.55,1) 10(2.55,2)
  F.SilkS region: -2.4,2.527 -2.64,2.857 -2.16,2.857
  F.SilkS lines w0.254: -2.07,2.57 2.07,2.57 ; -2.07,-2.57 2.07,-2.57
  F.CrtYd lines w0.254: -3.35,2.7 3.35,2.7 3.35,-2.7 -3.35,-2.7 -3.35,2.7
Symbol_Barrel_Polarity [mm]
  F.SilkS circle w0.254: c3,-0.075 r0.925
  F.SilkS circle w0.254: c0,-0.075 r0.175
  F.SilkS circle w0.254: c-3,-0.075 r0.925
  F.SilkS lines w0.254: -2,-0.075 -1.1,-0.075 ; 0,-0.075 2,-0.075 ; 0.675,0.675 ccw(c0,-0.075) 0.75,-0.75
TerminalBlock_RND_205-00232_1x02_P5.08mm_Horizontal [mm]
  rrect12% 2.1x2.1 hole 1.1 paste-2539.97 mask-2.1: 1(0,0)
  round 2.1 hole 1.1 paste-2539.97 mask-2.1: 2(5.08,0)
  F.SilkS region: 0.44,-4.78 -0.44,-4.78 0,-4.17
  F.SilkS lines w0.254: -2.66,2.55 7.74,2.55 ; -2.66,-2.45 7.74,-2.45 ; -2.66,-3.55 7.74,-3.55 ; -0.3,-4.17 -2.66,-4.17 -2.66,4.52 7.74,4.52 7.74,-4.17 0.3,-4.17 ; -1.25,4.4 1.25,4.4 1.25,3.4 -1.25,3.4 -1.25,4.4 ; 3.83,4.4 6.33,4.4 6.33,3.4 3.83,3.4 3.83,4.4
  F.CrtYd lines w0.254: -3.04,4.9 -3.04,-4.55 8.13,-4.55 8.13,4.9 -3.04,4.9
TestPoint_Bridge_Pitch5.08mm_Drill1.3mm [mm]
  round 2.6 hole 1.3 paste-2539.97 mask-2.6: 1(0,0) 1(5.08,0)
  F.SilkS lines w0.254: -1.5,-1.5 6.6,-1.5 6.6,1.5 -1.5,1.5 -1.5,-1.5
  F.CrtYd lines w0.254: -1.8,-1.8 6.88,-1.8 6.88,1.8 -1.8,1.8 -1.8,-1.8
TO-252-2 [mm]
  rrect21% 2.2x1.2 smd paste-2.2 mask-2.2: 1(-5.04,2.28) 3(-5.04,-2.28)
  rrect4% 6.4x5.8 smd paste-6.4 mask-6.4: 2(1.26,0)
  rrect9% 3.05x2.75 on Mid13 paste-3.05 mask-3.05: Un1(-0.415,1.525) Un2(-0.415,-1.525) Un3(2.935,1.525) Un4(2.935,-1.525)
  F.SilkS region: -5.04,3.14 -5.38,3.61 -4.7,3.61
  F.SilkS lines w0.254: 3.11,-3.45 -3.31,-3.45 -3.31,-3.18 ; -3.31,3.18 -3.31,3.45 3.11,3.45
  F.CrtYd lines w0.254: 4.71,-3.5 4.71,3.5 -6.39,3.5 -6.39,-3.5 4.71,-3.5

## Part data
C1 C2 C3 C4: library part C_0603_1608Metric, "Capacitor SMD 0603 (1608 Metric), square (rectangular) end terminal, IPC-7351 nominal, (Body size source: IPC-SM-782 page 76, https://www.pcb-3d.com/wordpress/wp-content/uploads/ipc-sm-782a_amendment_1_and_2.pdf), generated with kicad-footprint-generator", LCSC=C913904, MFR P/N=CL10A225KB8NNNC, Description="Unpolarized capacitor", Absolute minimum=100V, Reference MFG P/N=C6119935, ki_fp_filters=C_*
C5 C13 C14 C16 C18: library part C_0603_1608Metric, "Capacitor SMD 0603 (1608 Metric), square (rectangular) end terminal, IPC-7351 nominal, (Body size source: IPC-SM-782 page 76, https://www.pcb-3d.com/wordpress/wp-content/uploads/ipc-sm-782a_amendment_1_and_2.pdf), generated with kicad-footprint-generator", LCSC=C1591, MFR P/N=CL10B104KB8NNNC, ki_fp_filters=C_*
  C5: Description="Unpolarized capacitor", Absolute minimum=50V, Reference MFG P/N=C5142567
  C13 C14 C16: Internal P/N=C100N-50-0603
  C18: Description="Unpolarized capacitor, small symbol"
C6: library part C_0603_1608Metric, "Capacitor SMD 0603 (1608 Metric), square (rectangular) end terminal, IPC-7351 nominal, (Body size source: IPC-SM-782 page 76, https://www.pcb-3d.com/wordpress/wp-content/uploads/ipc-sm-782a_amendment_1_and_2.pdf), generated with kicad-footprint-generator", LCSC=C1621, MFR P/N=CL10B472KB8NNNC, Description="Unpolarized capacitor", Absolute minimum=50V, Reference MFG P/N=C7503510, ki_fp_filters=C_*
C7: library part C_0603_1608Metric, "Capacitor SMD 0603 (1608 Metric), square (rectangular) end terminal, IPC-7351 nominal, (Body size source: IPC-SM-782 page 76, https://www.pcb-3d.com/wordpress/wp-content/uploads/ipc-sm-782a_amendment_1_and_2.pdf), generated with kicad-footprint-generator", LCSC=C1671, MFR P/N=CL10C470JB8NNNC, Description="Unpolarized capacitor", Absolute minimum=50V, Reference MFG P/N=C466230, ki_fp_filters=C_*
C8 C9 C10 C11 C12 C17: library part C_0805_2012Metric, "Capacitor SMD 0805 (2012 Metric), square (rectangular) end terminal, IPC-7351 nominal, (Body size source: IPC-SM-782 page 76, https://www.pcb-3d.com/wordpress/wp-content/uploads/ipc-sm-782a_amendment_1_and_2.pdf, https://docs.google.com/spreadsheets/d/1BsfQQcO9C6DZCsRaXUlFlo91Tg2WpOkGARC1WS5S8t0/edit?usp=sharing), generated with kicad-footprint-generator", LCSC=C602037, MFR P/N=CL21A226MAYNNNE
  C8 C9 C10: Description="Unpolarized capacitor", Absolute minimum=10V, Reference MFG P/N=C19103846, ki_fp_filters=C_*
  C11 C12 C17: Internal P/N=C47U-25-5_5.4, ki_fp_filters=CP_*
C15: library part C_0603_1608Metric, "Capacitor SMD 0603 (1608 Metric), square (rectangular) end terminal, IPC-7351 nominal, (Body size source: IPC-SM-782 page 76, https://www.pcb-3d.com/wordpress/wp-content/uploads/ipc-sm-782a_amendment_1_and_2.pdf), generated with kicad-footprint-generator", LCSC=C64705, MFR P/N=CL10B224KB8NNNC, Internal P/N=C220N-50-0603, ki_fp_filters=C_*
C19: library part C_0603_1608Metric, "Capacitor SMD 0603 (1608 Metric), square (rectangular) end terminal, IPC-7351 nominal, (Body size source: IPC-SM-782 page 76, https://www.pcb-3d.com/wordpress/wp-content/uploads/ipc-sm-782a_amendment_1_and_2.pdf), generated with kicad-footprint-generator", LCSC=C1589, MFR P/N=CL10B103KB8NNNC, Description="Unpolarized capacitor, small symbol", ki_fp_filters=C_*
D1 D6: library part D_SMC, "Diode SMC (DO-214AB)", LCSC=C5199108, MFR P/N=SS54, Datasheet=http://www.jameco.com/Jameco/Products/ProdDS/1538777.pdf, Description="40V 2A Schottky Barrier Rectifier Diode, SMB", Absolute minimum="40V 5A", Reference MFG P/N=C5200096, ki_fp_filters=D*SMB*
D2: library part D_SOD-123, "SOD-123", LCSC=C66198, MFR P/N=MMSZ5231BT1G, Internal P/N=DZ-5.1, ki_fp_filters="TO-???* *_Diode_* *SingleDiode* D_*"
D3 D4: library part LED_0603_1608Metric, "LED SMD 0603 (1608 Metric), square (rectangular) end terminal, IPC-7351 nominal, (Body size source: http://www.tortai-tech.com/upload/download/2011102023233369053.pdf), generated with kicad-footprint-generator", LCSC=C965802, MFR P/N=XL-1608UYC-06, ki_fp_filters="LED* LED_SMD:* LED_THT:*"
  D3: Internal P/N=DL-GREEN-0603
  D4: Internal P/N=DL-RED-0603
D5: library part TO-252-2, "TO-252/DPAK SMD package, http://www.infineon.com/cms/en/product/packages/PG-TO252/PG-TO252-3-1/", LCSC=C460890, MFR P/N=MBRD20100CT-13, Description="20A SCHOTTKY BARRIER RECTIFIER"
F1 F2 F3: library part Fuse_2920_7451Metric, "Fuse SMD 2920 (7451 Metric), square (rectangular) end terminal, IPC-7351 nominal, (Body size from: http://www.megastar.com/products/fusetronic/polyswitch/PDF/smd2920.pdf), generated with kicad-footprint-generator", LCSC=C6165172, MFR P/N=SMD2920-500/24N, Description="24V 5A 40A 10A 2920 Resettable Fuses ROHS", Absolute minimum="16V 3A", Reference MFG P/N=C6165172, ki_fp_filters="*polyfuse* *PTC*"
G***: library part "Recognized Component very small"
H1 H2 H3 H4: library part MountingHole_3.2mm_M3_Pad_Via, "Mounting Hole 3.2mm, M3, generated by kicad-footprint-generator mountinghole.py", Description="Mounting Hole with connection", ki_fp_filters=MountingHole*Pad*
J1: library part BarrelJack_GCT_DCJ200-10-A_Horizontal, "Barrel jack connector (5.5 mm outer diameter, 2.05 inner diameter ), https://gct.co/files/drawings/dcj200-10.pdf", LCSC=C194407, MFR P/N=DC-470-2.1GP, Description="DC Barrel Jack with an internal switch", ki_fp_filters=BarrelJack*
J2 J3 J4: library part TerminalBlock_RND_205-00232_1x02_P5.08mm_Horizontal, "terminal block RND 205-00232, 2 pins, pitch 5.08mm, size 10.2x8.45mm, drill diameter 1.1mm, pad diameter 2.1mm, http://cdn-reichelt.de/documents/datenblatt/C151/RND_205-00232_DB_EN.pdf, script-generated using https://gitlab.com/kicad/libraries/kicad-footprint-generator/-/tree/master/scripts/TerminalBlock_RND", LCSC=C8465, MFR P/N=WJ500V-5.08-2P, Description="Generic screw terminal, single row, 01x02, script generated (kicad-library-utils/schlib/autogen/connector/)", ki_fp_filters=TerminalBlock*:*
JP1: library part SolderJumper-3_P1.3mm_Open_Pad1.0x1.5mm, "SMD Solder 3-pad Jumper, 1x1.5mm Pads, 0.3mm gap, open", ki_fp_filters="Jumper* TestPoint*3Pads* TestPoint*Bridge*"